# Altium PCB mark3_1.PcbDoc
Units mm, origin at the board's own origin, x right, y up, seen from the top; angles counter-clockwise.
Board outline 200 x 200 mm, 2 copper layers (Top Layer, Bottom Layer); 25 components, 30 nets, 160 pads, 0 vias.
Unrouted connection lines stored in the file: 1.
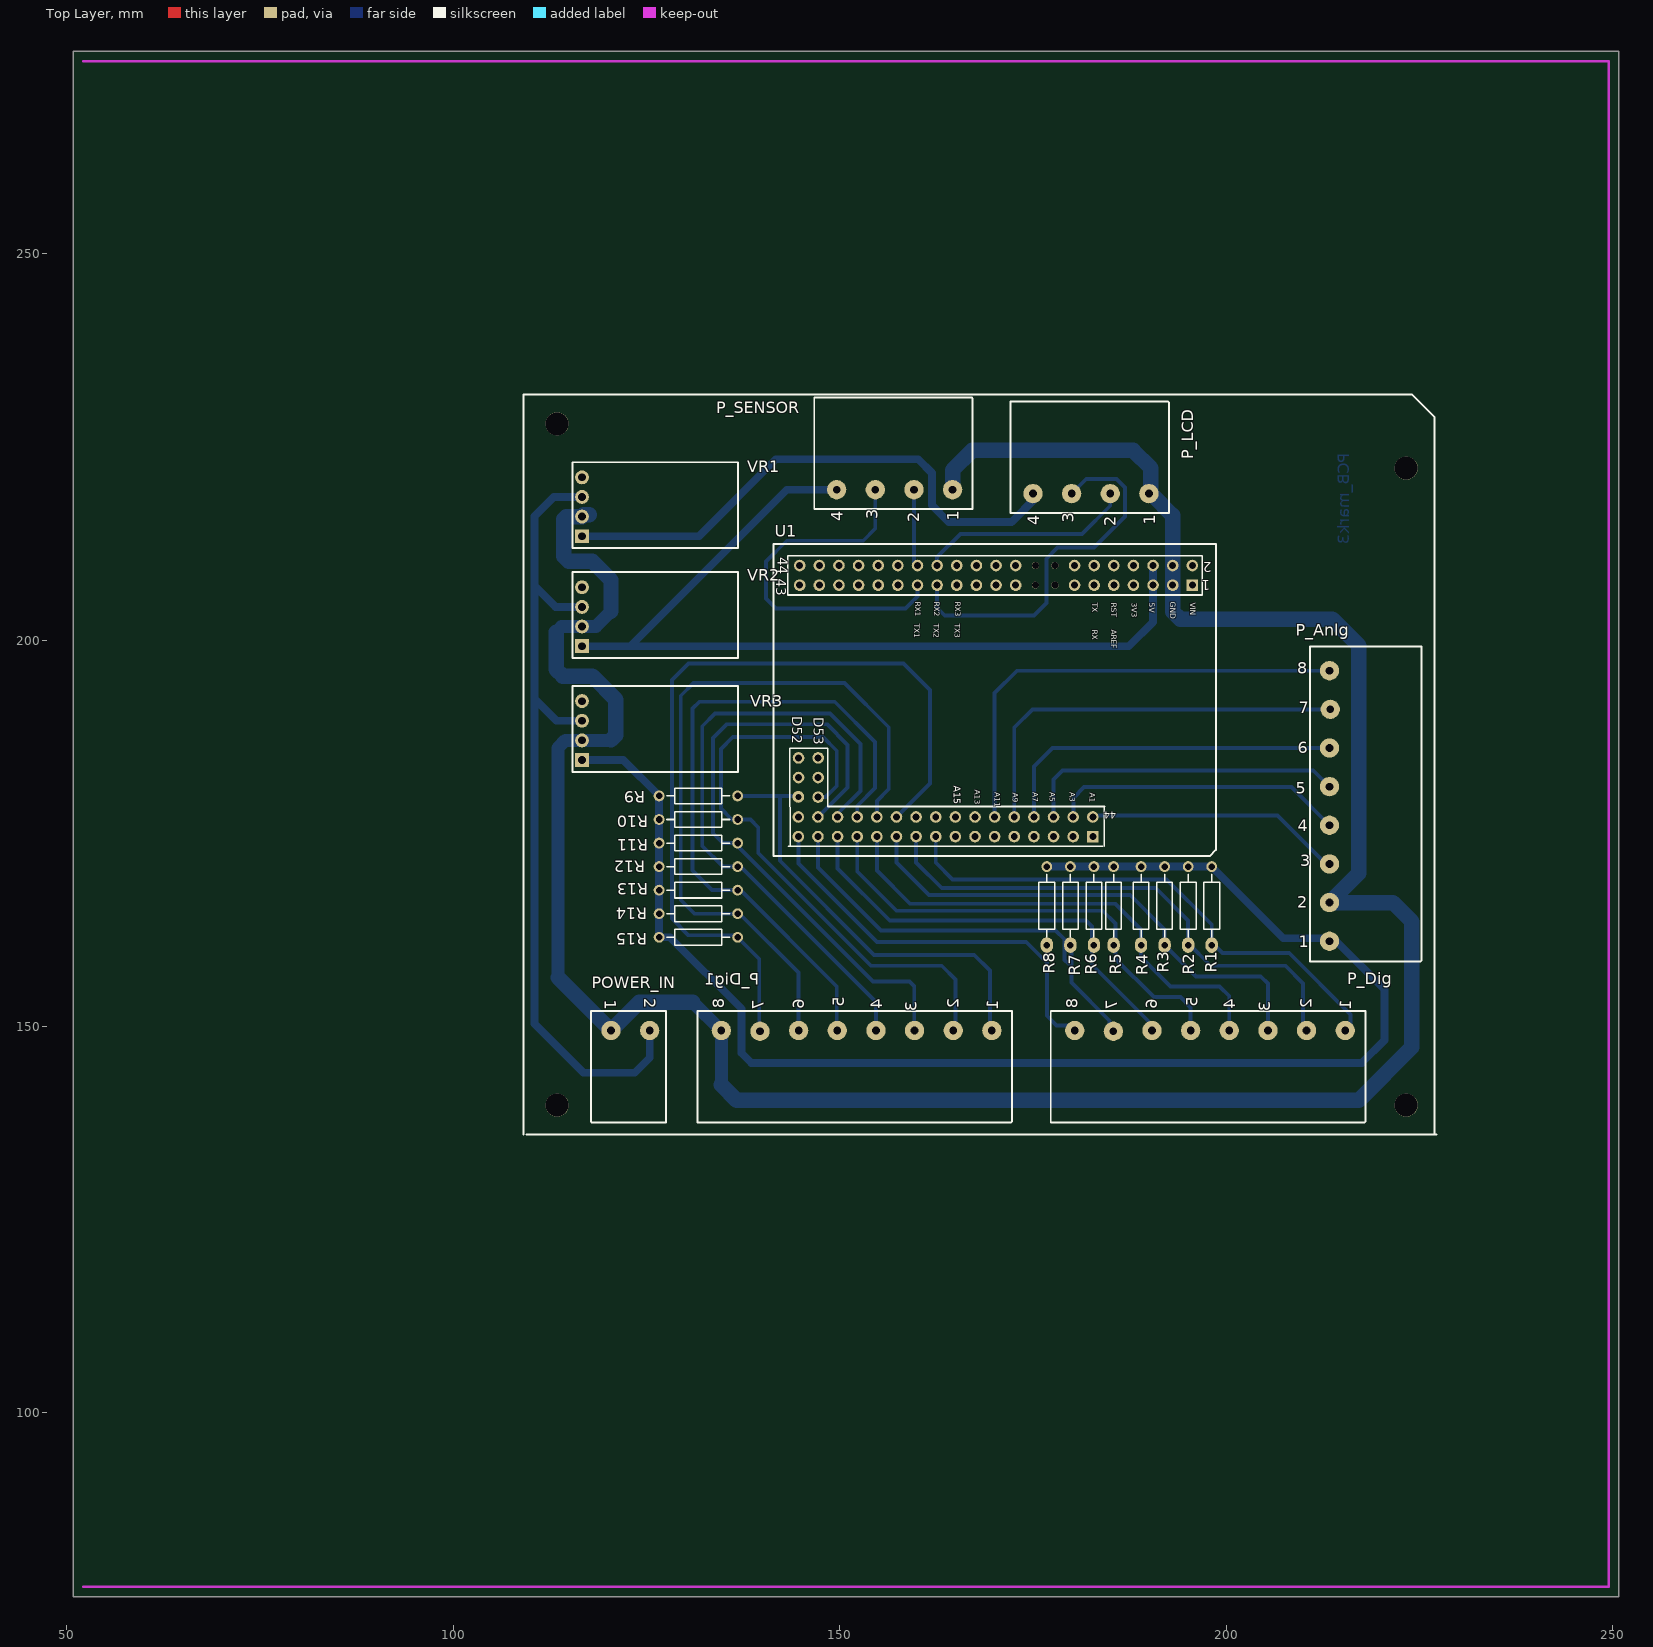
[diagram p0: Top Layer view]
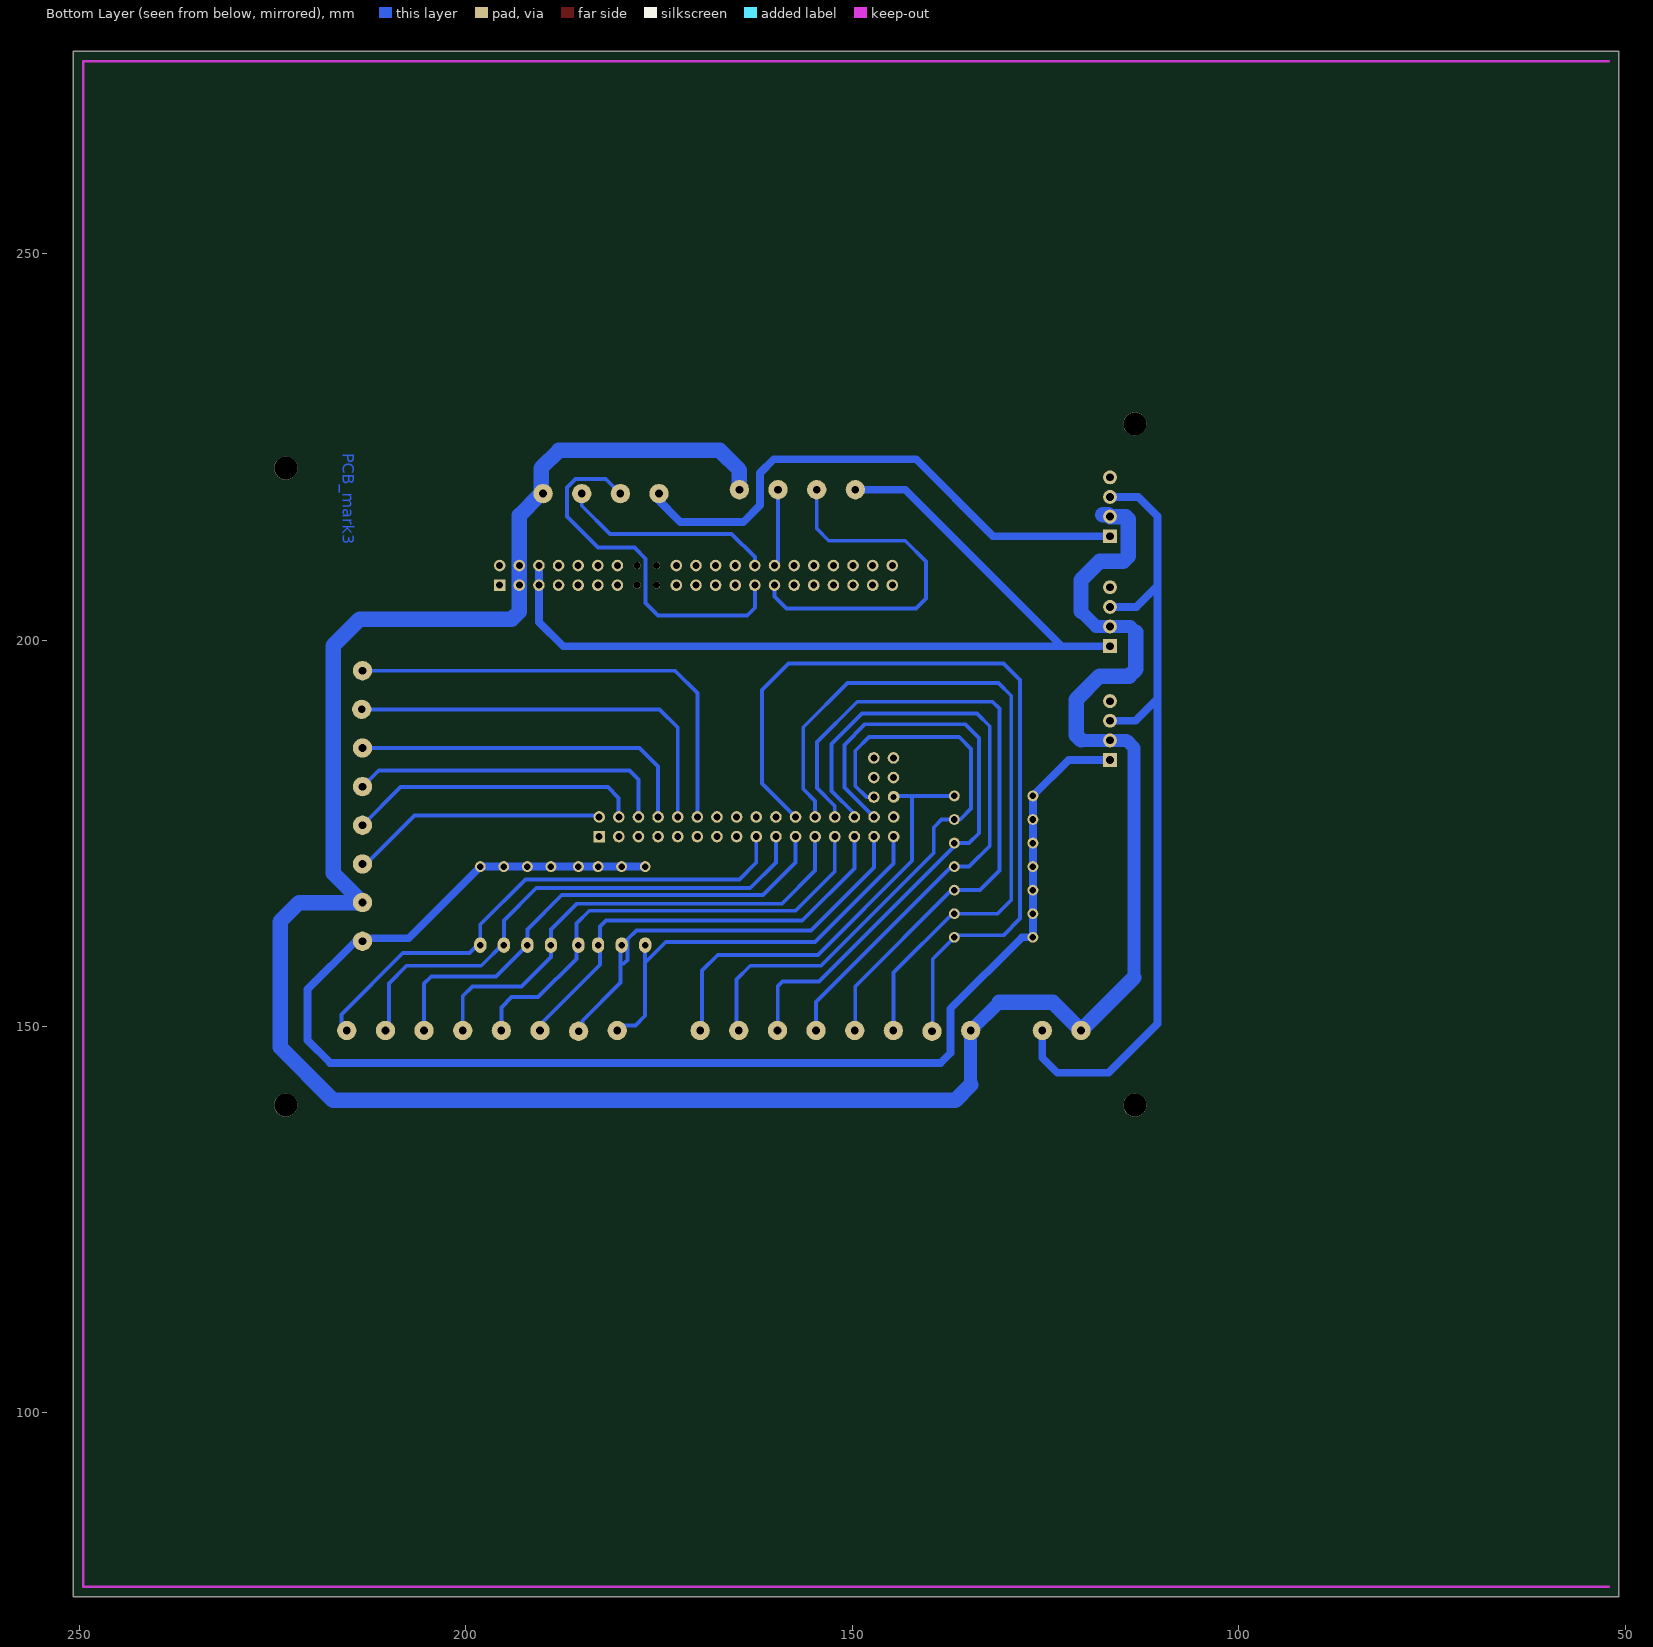
[diagram p1: Bottom Layer view, seen from below]

## Layer stack, top to bottom
Top Layer: signal copper 0.0356
Dielectric: dielectric 0.32, FR-4, Dk 4.8
Bottom Layer: signal copper 0.0356

## Board outline
50.8,76.2 250.8,76.2 250.8,276.2 50.8,276.2

## Design rules (kind name [scope] priority, off if disabled: settings)
Clearance [All] p1: gap=0.4
PolygonConnect [All] p1: connectstyle=Relief reliefconductorwidth=0.254 reliefentries=4 polygonreliefangle="90 Angle"
RoutingVias [All] p1: holewidth=1 width=2 viastyle="Through Hole" minholewidth=0.711 minwidth=1.27 maxholewidth=0.711 maxwidth=1.27
SilkscreenOverComponentPads [All] p1: minsilkscreentomaskgap=0.254
SolderMaskExpansion [All] p1: expansion=0.102
TestPointUsage [All] p1: valid=0 allowmultiple=FALSE
Testpoint [All] p1: side=15 testpointundercomponent=TRUE minsize=1.016 maxsize=2.54 preferedsize=1.524 minholesize=0 maxholesize=1.016 preferedholesize=0.813 testpointgrid=0.025 style=1023 order=0123456789
Width [All] p1: maxlimit=2 minlimit=0.5 preferedwidth=0.5
23 further rules are at their usual default settings.

## Components (designator, comment, footprint, x,y, rotation, side; value= is the part's Value field where it differs from the comment)
P_Anlg "Header 8" TERM_8P_GREEN#1 213.36,161.036 r0 top
P_Dig "Header 8" TERM_8P_GREEN#2 215.392,149.479 r270 top
P_Dig1 "Header 8" TERM_8P_GREEN#2 169.672,149.479 r270 top
P_LCD "MHDR1X4" TERM_4P_GREEN 189.992,218.948 r90 top
P_SENSOR "MHDR1X4" TERM_4P_GREEN 164.592,219.456 r90 top
POWER_IN "Term_2Pin_Green" TERM_2P_GREEN 120.396,149.479 r270 top
R1 "Res2" AXIAL-0.4#1 198.12,165.608 r90 top
R2 "Res2" AXIAL-0.4#1 195.072,165.608 r90 top
R3 "Res2" AXIAL-0.4#1 192.024,165.608 r90 top
R4 "Res2" AXIAL-0.4#1 188.976,165.608 r90 top
R5 "Res2" AXIAL-0.4#1 185.42,165.608 r90 top
R6 "Res2" AXIAL-0.4#1 182.88,165.608 r90 top
R7 "Res2" AXIAL-0.4#1 179.832,165.608 r90 top
R8 "Res2" AXIAL-0.4#1 176.784,165.608 r90 top
R9 "Res2" AXIAL-0.4#2 131.699,179.832 r180 top
R10 "Res2" AXIAL-0.4#2 131.699,176.784 r180 top
R11 "Res2" AXIAL-0.4#2 131.699,173.736 r180 top
R12 "Res2" AXIAL-0.4#2 131.699,170.688 r180 top
R13 "Res2" AXIAL-0.4#2 131.699,167.64 r180 top
R14 "Res2" AXIAL-0.4#2 131.699,164.592 r180 top
R15 "Res2" AXIAL-0.4#2 131.699,161.544 r180 top
U1 "Arduino MEGA EMBEDED" ARDUINOMEGA 142.748,218.44 r270 top
VR1 "MODUL_LM2596_mini" MODUL_LM2596_mini 116.713,221.107 r0 top
VR2 "MODUL_LM2596_mini" MODUL_LM2596_mini 116.713,206.883 r0 top
VR3 "MODUL_LM2596_mini" MODUL_LM2596_mini 116.713,192.151 r0 top

## Footprints (in the part's own frame and the unit in brackets; to place one, negate y for a bottom-side part, rotate by r counter-clockwise, add the part's x,y. Pads: shape width x height; smd on the part's side, far side on the other; paste and mask are expansions set on the pad)
ARDUINOMEGA [mm]
  rect 1.5x1.5 hole 0.9: 1(11.339,52.863) 43(43.871,39.983)
  round 1.5 hole 0.9: 2(8.799,52.863) 3(11.339,50.323) 4(8.799,50.323) 5(11.339,47.783) 6(8.799,47.783) 7(11.339,45.243) 8(8.799,45.243) 9(11.339,42.703) 10(8.799,42.703) 11(11.339,40.163) 12(8.799,40.163) 13(11.339,37.623) 14(8.799,37.623) 19(11.339,30.003) 20(8.799,30.003) 21(11.339,27.463) 22(8.799,27.463) 23(11.339,24.923) 24(8.799,24.923) 25(11.339,22.383) 26(8.799,22.383) 27(11.339,19.843) 28(8.799,19.843) 29(11.339,17.303) 30(8.799,17.303) 31(11.339,14.763) 32(8.799,14.763) 33(11.339,12.223) 34(8.799,12.223) 35(11.339,9.683) 36(8.799,9.683) 37(11.339,7.143) 38(8.799,7.143) 39(11.339,4.603) 40(8.799,4.603) 41(11.339,2.063) 42(8.799,2.063) 44(41.331,39.983) 45(43.871,37.443) 46(41.331,37.443) 47(43.871,34.903) 48(41.331,34.903) 49(43.871,32.363) 50(41.331,32.363) 51(43.871,29.823) 52(41.331,29.823) 53(43.871,27.283) 54(41.331,27.283) 55(43.871,24.743) 56(41.331,24.743) 57(43.871,22.203) 58(41.331,22.203) 59(43.871,19.663) 60(41.331,19.663) 61(43.871,17.123) 62(41.331,17.123) 63(43.871,14.583) 64(41.331,14.583) 65(43.871,12.043) 66(41.331,12.043) 67(43.871,9.503) 68(41.331,9.503) 69(43.871,6.963) 70(41.331,6.963) 71(43.871,4.423) 72(41.331,4.423) 73(43.871,1.883) 74(41.331,1.883) 76(38.765,4.449) 77(36.225,1.909) 78(36.225,4.449) 79(33.685,1.909) 80(33.685,4.449)
  round 0.9 hole 0.9: 15(11.339,35.083) 16(8.799,35.083) 17(11.339,32.543) 18(8.799,32.543)
  round 1.524 hole 0.762: 75(38.731,1.883)
  silkscreen extent 6,-1.3 46.4,55.9
AXIAL-0.4#1 [mm] "Resistor; 2 Leads"
  oval 2x1.6 hole 0.85: 1(-5.08,0)
  round 1.4 hole 0.85: 2(5.08,0)
  silkscreen extent -4.06,-1.02 4.06,1.02
AXIAL-0.4#2 [mm] "Resistor; 2 Leads"
  round 1.4 hole 0.85: 1(-5.08,0) 2(5.08,0)
  silkscreen extent -4.06,-1.02 4.06,1.02
MODUL_LM2596_mini [mm]
  rect 1.8x1.8 hole 1: 1(-0.072,-7.672)
  round 1.8 hole 1: 2(-0.072,-5.132) 3(-0.072,-2.592) 4(-0.072,-0.052)
  silkscreen extent -1.3,-9.2 20.1,1.9
TERM_2P_GREEN [mm]
  round 2.5 hole 1: 1(0,0) 2(0,5)
  silkscreen extent -2.5,-2.6 11.9,7.1
TERM_4P_GREEN [mm]
  round 2.5 hole 1: 1(0,0) 2(0,5) 3(0,10) 4(0,15)
  silkscreen extent -2.5,-2.6 11.9,17.9
TERM_8P_GREEN#1 [mm]
  round 2.5 hole 1: 1(0,0) 2(0,5) 3(0,10) 4(0,15) 5(0,20) 6(0,25) 7(0.1,30) 8(0,35)
  silkscreen extent -2.5,-2.6 11.9,38.1
TERM_8P_GREEN#2 [mm]
  round 2.5 hole 1: 1(0,0) 2(0,-5) 3(0,-10) 4(0,-15) 5(0,-20) 6(0,-25) 7(0.1,-30) 8(0,-35)
  silkscreen extent -2.5,-38.1 11.9,2.6

## Part data
P_Anlg P_Dig P_Dig1: "Header, 8-Pin"
P_LCD P_SENSOR: "Header, 4-Pin"
POWER_IN: library part Term_2Pin_Blck
R1 R2 R3 R4 R5 R6 R7 R8 R9 R10 R11 R12 R13 R14 R15: "Resistor"

## Free pads (board coordinates)
  round 3 hole 3: 1(113.411,139.827) 1(113.411,227.965) 1(223.266,139.827) 1(223.266,222.25)

## Nets (pads, with @x,y where several pads share a name; then routed paths per layer and width w, separated by ;. In a path a pad name is that pad's centre, name@x,y a point inside that pad or via, vN(x,y) a via of type N, cw(c..) or ccw(c..) an arc to the next point about the centre after c; other vN are vias at no path point)
5V_LCD: P_LCD.4 VR1.1 | length 70.5
  Bottom Layer w1: VR1.1 131.774,213.435 141.732,223.393 160.147,223.393 161.925,221.615 161.925,217.424 164.084,215.265 172.212,215.265 P_LCD.4@175.387,218.44 ; P_LCD.4@174.498,218.948 P_LCD.4
5V_PU: P_Anlg.1 R1.2 R2.2 R3.2 R4.2 R5.2 R6.2 R7.2 R8.2 R9.2 R10.2 R11.2 R12.2 R13.2 R14.2 R15.2 VR3.1 | length 192.2
  Bottom Layer w1: VR3.1 121.972,184.479 R9.2 R10.2 R11.2 R12.2 R13.2 R14.2 R15.2 128.016,161.544 137.287,152.273 137.287,146.558 138.557,145.288 217.551,145.288 220.472,148.209 220.472,154.813 214.249,161.036 P_Anlg.1 212.979,161.417 207.391,161.417 R1.2 R2.2 R3.2 R4.2 R5.2 R6.2 R7.2 R8.2
5V_U1: P_SENSOR.4 U1.5 U1.6 VR2.1 | length 117.6
  Bottom Layer w1: VR2.1 122.884,199.211 ; P_SENSOR.4 143.129,219.456 122.884,199.211 ; U1.6 190.531,202.342 187.4,199.211 122.884,199.211
D1: P_Dig.1 R1.1 U1.59 | length 68.5
  Bottom Layer w0.5: U1.59 162.411,171.218 164.592,169.037 192.278,169.037 198.12,163.195 198.12,160.909 199.517,159.512 208.153,159.512 216.09,151.575 P_Dig.1@216.09,149.542
D2: P_Dig.2 R2.1 U1.61 | length 68.1
  Bottom Layer w0.5: U1.61 159.871,171.218 163.184,167.905 190.87,167.905 195.072,163.703 195.072,160.782 197.993,157.861 207.645,157.861 209.931,155.575 P_Dig.2@209.931,149.098
D3: P_Dig.3 R3.1 U1.63 | length 65.2
  Bottom Layer w0.5: U1.63 157.331,171.218 161.544,167.005 187.579,167.005 192.024,162.56 R3.1 196.088,156.464 204.47,156.464 205.392,155.542 P_Dig.3
D4: P_Dig.4 R4.1 U1.65 | length 63.2
  Bottom Layer w0.5: U1.65 154.791,170.202 159.12,165.873 185.663,165.873 188.976,162.56 R4.1 188.976,159.004 192.786,155.194 199.136,155.194 200.392,153.938 P_Dig.4
D5: P_Dig.5 R5.1 U1.67 | length 60.6
  Bottom Layer w0.5: U1.67 152.251,170.075 157.353,164.973 184.023,164.973 185.674,163.322 185.674,158.75 190.627,153.797 194.056,153.797 195.392,152.461 P_Dig.5
D6: P_Dig.6 R6.1 U1.69 | length 55.4
  Bottom Layer w0.5: U1.69 149.711,170.456 156.464,163.703 181.864,163.703 182.626,162.941 182.626,157.988 189.928,150.685
D7: P_Dig.7 R7.1 U1.71 | length 56.3
  Bottom Layer w0.5: U1.71 147.171,170.583 155.321,162.433 177.927,162.433 179.07,161.29 179.07,158.623 179.578,158.115 ; R7.1@179.959,160.274 179.959,155.702 184.912,150.749 P_Dig.7@184.912,149.098
D8: P_Dig.8 R8.1 U1.73 | length 54.4
  Bottom Layer w0.5: U1.73 144.631,171.091 154.813,160.909 174.117,160.909 176.784,158.242 ; R8.1@176.497,160.815 R8.1@176.657,160.655 ; R8.1 176.784,158.242 ; P_Dig.8@180.34,150.114 178.054,150.114 176.784,151.384 176.784,158.242
D9: P_Dig1.1 R9.1 U1.75 | length 56.5
  Bottom Layer w0.5: R9.1 142.24,179.832 ; U1.75@144.508,179.832 142.24,179.832 ; P_Dig1.1@169.418,149.86 169.418,157.226 167.386,159.258 154.432,159.258 142.24,171.45 142.24,179.832
D10: P_Dig1.2 R10.1 U1.76 | length 79.1
  Bottom Layer w0.5: U1.76 148.146,179.675 149.606,181.135 149.606,185.674 147.828,187.452 136.144,187.452 134.62,185.928 134.62,178.181 136.017,176.784 R10.1 138.43,176.784 139.446,175.768 139.446,172.466 154.051,157.861 163.195,157.861 164.973,156.083 P_Dig1.2@164.973,150.114
D11: P_Dig1.3 R11.1 U1.72 | length 82
  Bottom Layer w0.5: U1.72 151.003,180.941 151.003,186.436 148.325,189.114 135.393,189.114 133.604,187.325 133.604,175.006 134.874,173.736 R11.1 136.779,173.355 154.305,155.829 159.004,155.829 159.639,155.194 P_Dig1.3@159.639,150.114
D12: P_Dig1.4 R12.1 U1.70 | length 83.5
  Bottom Layer w0.5: U1.70 149.711,177.524 152.654,180.467 152.654,186.563 148.717,190.5 133.858,190.5 132.207,188.849 132.207,173.355 134.874,170.688 R12.1 137.16,170.688 154.686,153.162 P_Dig1.4@154.686,149.479
D13: P_Dig1.5 R13.1 U1.68 | length 87.7
  Bottom Layer w0.5: P_Dig1.5@149.606,150.114 149.606,155.194 137.16,167.64 133.477,167.64 130.937,170.18 130.937,191.135 131.826,192.024 149.352,192.024 154.559,186.817 154.559,180.848 152.251,178.54 U1.68
D14: P_Dig1.6 R14.1 U1.66 | length 94.5
  Bottom Layer w0.5: P_Dig1.6@144.653,150.241 144.653,156.972 137.033,164.592 R14.1 131.191,164.592 129.413,166.37 129.413,192.786 131.064,194.437 150.622,194.437 156.337,188.722 156.337,180.721 154.791,179.175 U1.66
D15: P_Dig1.7 R15.1 U1.62 U1.64 | length 107
  Bottom Layer w0.5: P_Dig1.7@139.573,149.987 139.573,158.75 R15.1 136.525,161.798 130.429,161.798 128.27,163.957 128.27,194.818 130.429,196.977 158.242,196.977 161.671,193.548 161.671,181.449 U1.64
GND: P_Anlg.2 P_Dig1.8 P_LCD.1 P_SENSOR.1 POWER_IN.1 U1.3 U1.4 VR1.2 VR2.2 VR3.2 | length 349.3
  Bottom Layer w1.7: 113.284,201.041 113.994,201.751 118.237,201.751 ; 113.538,156.337 113.538,186.055 114.502,187.019 VR3.2 120.015,187.019 ; 118.439,201.751 120.396,203.708 ; 130.989,153.162 P_Dig1.8 134.672,142.442
  Bottom Layer w2: 113.284,201.041 113.284,196.215 114.173,195.326 117.983,195.326 121.031,192.278 121.031,187.706 120.396,187.071 ; 113.538,156.337 POWER_IN.1 124.079,153.162 130.989,153.162 ; 117.594,216.215 116.881,216.215 VR1.2 114.629,215.975 114.3,215.646 114.3,210.82 114.935,210.185 117.983,210.185 120.396,207.772 120.396,203.708 ; 134.672,142.442 136.652,140.462 217.17,140.462 224.028,147.32 224.028,163.576 221.568,166.036 P_Anlg.2 217.17,169.846 217.17,199.263 213.741,202.692 194.056,202.692 193.071,203.677 U1.3 U1.4 193.071,216.123 P_LCD.1@190.373,218.821 ; P_SENSOR.1 164.592,221.996 167.132,224.536 187.96,224.536 190.246,222.25 P_LCD.1@190.246,219.202
POT1: P_Anlg.3 U1.44 | length 32.4
  Bottom Layer w0.5: 183.515,177.292 206.629,177.292 212.885,171.036 P_Anlg.3
POT2: P_Anlg.4 U1.46 | length 38.1
  Bottom Layer w0.5: U1.46@180.213,177.292 180.213,179.578 181.61,180.975 208.421,180.975 P_Anlg.4
POT3: P_Anlg.5 U1.48 | length 41.9
  Bottom Layer w0.5: U1.48 177.651,181.969 178.816,183.134 211.262,183.134 P_Anlg.5
POT4: P_Anlg.6 U1.50 | length 45.4
  Bottom Layer w0.5: U1.50@175.133,177.419 175.133,183.642 177.527,186.036 P_Anlg.6
POT5: P_Anlg.7 U1.52 | length 53.4
  Bottom Layer w0.5: U1.52 172.571,188.7 174.907,191.036 P_Anlg.7
POT6: P_Anlg.8 U1.54 | length 60.6
  Bottom Layer w0.5: U1.54 170.031,193.145 172.922,196.036 P_Anlg.8
RX1: P_SENSOR.2 U1.30 | length 9.4
  Bottom Layer w0.5: U1.30@159.592,210.1 P_SENSOR.2
RX2: P_LCD.2 U1.28 | length 27.8
  Bottom Layer w0.5: U1.28 162.591,210.724 165.608,213.741 181.356,213.741 184.992,217.377 P_LCD.2
TX1: P_SENSOR.3 U1.29 | length 48
  Bottom Layer w0.5: P_SENSOR.3 154.592,215.232 154.592,214.409 153.035,212.852 143.129,212.852 140.462,210.185 140.462,205.359 141.732,204.089 158.496,204.089 160.051,205.644 U1.29
TX2: P_LCD.3 U1.27 | length 48.2
  Bottom Layer w0.5: U1.27 162.591,204.185 163.576,203.2 175.133,203.2 176.731,204.798 176.731,210.513 178.181,211.963 182.88,211.963 186.892,215.975 186.892,219.735 185.779,220.848 181.892,220.848 P_LCD.3
VR1: POWER_IN.2 VR1.3 VR2.3 VR3.3 | length 109.3
  Bottom Layer w1: VR3.3 113.336,189.559 110.491,192.404 ; VR2.3 113.21,204.291 110.491,207.01 ; VR1.3 112.978,218.515 110.491,216.028 110.491,207.01 ; POWER_IN.2 125.396,145.97 123.444,144.018 116.84,144.018 110.491,150.367 110.491,192.404 ; 110.491,192.404 110.491,207.01
pads on no net: U1.1 U1.2 U1.7 U1.8 U1.9 U1.10 U1.11 U1.12 U1.13 U1.14 U1.15 U1.16 U1.17 U1.18 U1.19 U1.20 U1.21 U1.22 U1.23 U1.24 U1.25 U1.26 U1.31 U1.32 U1.33 U1.34 U1.35 U1.36 U1.37 U1.38 U1.39 U1.40 U1.41 U1.42 U1.43 U1.45 U1.47 U1.49 U1.51 U1.53 U1.55 U1.56 U1.57 U1.58 U1.60 U1.74 U1.77 U1.78 U1.79 U1.80 VR1.4 VR2.4 VR3.4

## Keep-outs
Keep-Out Layer:
  lines w0.3: 52.1,77.5 249.5,77.5 249.5,274.9 52.1,274.9

## Other copper
Bottom Layer:
  text "PCB_mark3" at 215.9,224.155 h1.52 r90

## Silkscreen, mask and mechanical layers (free items; w line width, h text height)
Top Overlay:
  lines w0.254: 109.093,136.017 109.093,231.775 224.028,231.775 226.949,228.854 226.949,136.017 ; 109.474,136.017 227.203,136.017

## Text inside footprints (layer, text, board x,y; h text height)
P_Anlg: Top Overlay "1" at 209.36,160.236 h1.52; Top Overlay "2" at 209.16,165.336 h1.52; Top Overlay "3" at 209.56,170.736 h1.52; Top Overlay "4" at 209.26,175.236 h1.52; Top Overlay "5" at 208.96,180.136 h1.52; Top Overlay "6" at 209.26,185.336 h1.52; Top Overlay "7" at 209.36,190.536 h1.52; Top Overlay "8" at 209.16,195.636 h1.52
P_Dig: Top Overlay "8" at 180.792,153.679 h1.52 r90; Top Overlay "7" at 185.892,153.479 h1.52 r90; Top Overlay "6" at 191.092,153.579 h1.52 r90; Top Overlay "5" at 196.292,153.879 h1.52 r90; Top Overlay "4" at 201.192,153.579 h1.52 r90; Top Overlay "3" at 205.692,153.279 h1.52 r90; Top Overlay "2" at 211.092,153.679 h1.52 r90; Top Overlay "1" at 216.192,153.479 h1.52 r90
P_Dig1: Top Overlay "1" at 170.472,153.479 h1.52 r90; Top Overlay "2" at 165.372,153.679 h1.52 r90; Top Overlay "3" at 159.972,153.279 h1.52 r90; Top Overlay "4" at 155.472,153.579 h1.52 r90; Top Overlay "5" at 150.572,153.879 h1.52 r90; Top Overlay "6" at 145.372,153.579 h1.52 r90; Top Overlay "7" at 140.172,153.479 h1.52 r90; Top Overlay "8" at 135.072,153.679 h1.52 r90
P_LCD: Top Overlay "1" at 190.792,214.948 h1.52 r90; Top Overlay "2" at 185.692,214.748 h1.52 r90; Top Overlay "3" at 180.292,215.148 h1.52 r90; Top Overlay "4" at 175.792,214.848 h1.52 r90
P_SENSOR: Top Overlay "1" at 165.392,215.456 h1.52 r90; Top Overlay "2" at 160.292,215.256 h1.52 r90; Top Overlay "3" at 154.892,215.656 h1.52 r90; Top Overlay "4" at 150.392,215.356 h1.52 r90
POWER_IN: Top Overlay "2" at 124.696,153.679 h1.52 r270; Top Overlay "1" at 119.596,153.479 h1.52 r270
U1: Top Overlay "RX3" at 164.948,204.94 h0.72 r270; Top Overlay "TX3" at 164.848,202.14 h0.72 r270; Top Overlay "A13" at 167.448,180.64 h0.72 r270; Top Overlay "A11" at 170.048,180.34 h0.72 r270; Top Overlay "A9" at 172.348,180.24 h0.72 r270; Top Overlay "A7" at 174.948,180.34 h0.72 r270; Top Overlay "A5" at 177.148,180.34 h0.72 r270; Top Overlay "A3" at 179.748,180.34 h0.72 r270; Top Overlay "A1" at 182.348,180.24 h0.72 r270; Top Overlay "A15" at 164.448,181.14 h1.52 r270; Top Overlay "44" at 185.748,178.14 h1.52 r180; Top Overlay "D53" at 146.648,190.04 h1.27 r270; Top Overlay "D52" at 143.848,190.14 h1.27 r270; Top Overlay "43" at 141.748,207.94 h1.27 r270; Top Overlay "44" at 141.948,210.74 h1.27 r270; Top Overlay "1" at 197.948,207.74 h1.27 r180; Top Overlay "2" at 198.148,210.04 h1.27 r180; Top Overlay "VIN" at 195.348,204.84 h0.72 r270; Top Overlay "GND" at 192.748,204.94 h0.72 r270; Top Overlay "5V" at 190.048,204.84 h0.72 r270; Top Overlay "3V3" at 187.748,204.84 h0.72 r270; Top Overlay "RST" at 185.148,204.84 h0.72 r270; Top Overlay "AREF" at 185.148,201.34 h0.72 r270; Top Overlay "TX" at 182.648,204.84 h0.72 r270; Top Overlay "RX" at 182.648,201.34 h0.72 r270; Top Overlay "TX2" at 162.148,202.14 h0.72 r270; Top Overlay "RX2" at 162.248,204.94 h0.72 r270; Top Overlay "TX1" at 159.648,202.14 h0.72 r270; Top Overlay "RX1" at 159.748,204.94 h0.72 r270